# EAGLE board shield_horizontal+p (EAGLE 6.5.0)
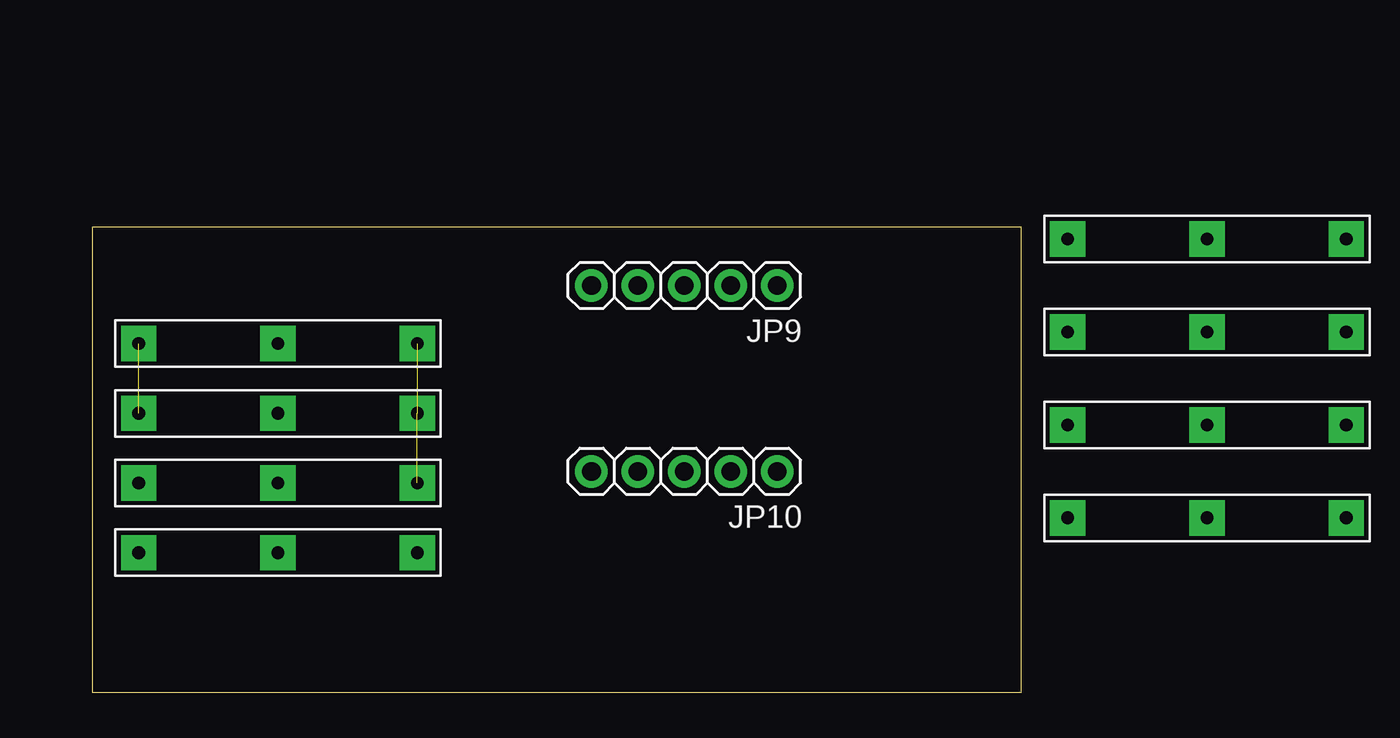
[diagram p0: board, top side]
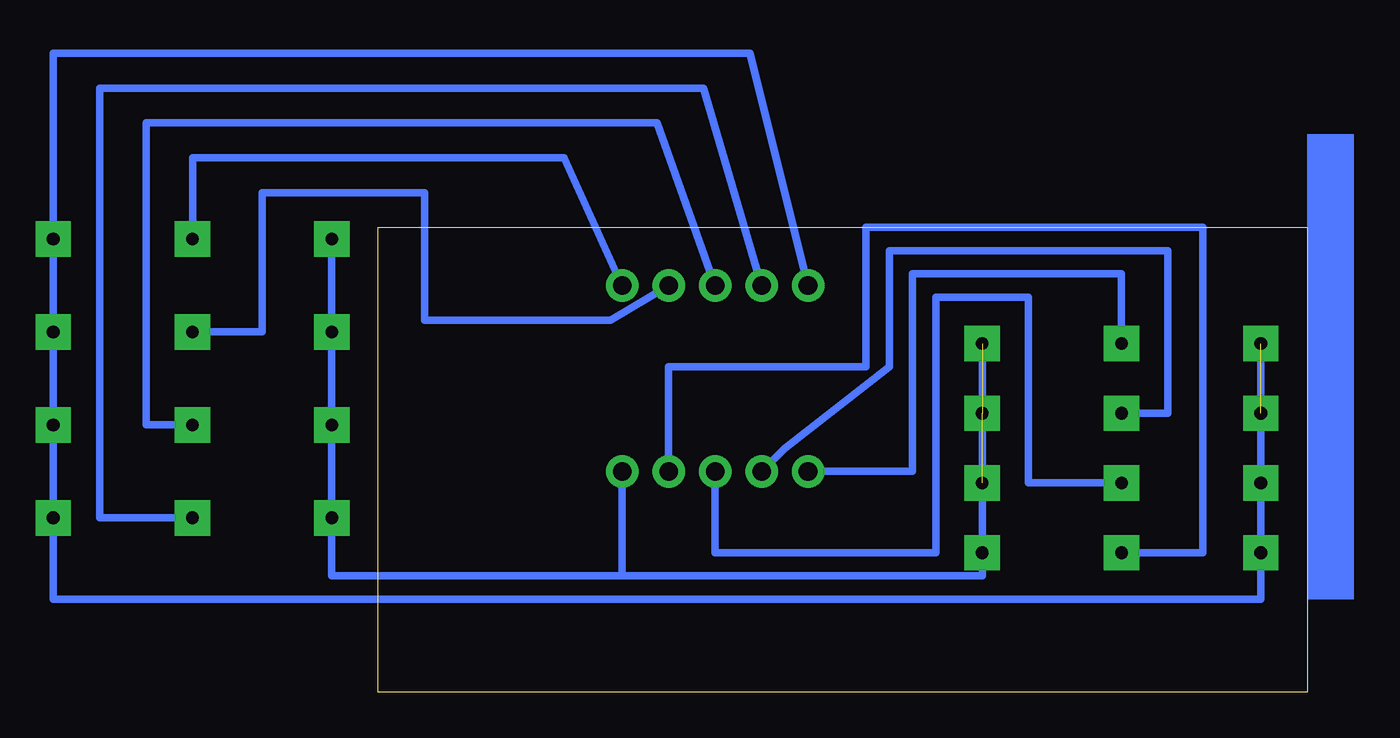
[diagram p1: board, bottom side, seen from below]

Size 50.8 x 25.4 mm. Coordinates in mm from the lower left corner, seen from the top.
Outline: 0,0 50.8,0 50.8,25.4 0,25.4 0,0
Copper layers (1*16): Top 0.035mm / dielectric 1.5mm / Bottom 0.035mm
Design rules "default": minimum track width 10mil, minimum drill 24mil, track to track 8mil, track to pad 8mil, pad to pad 8mil, via to via 8mil, smd to smd 8mil, copper to edge 40mil, drill to drill 8mil, minimum pad ring 10mil, minimum via ring 8mil, stop-mask expansion 4mil, vias tented up to drill 0mil, thermal gap 10mil

## Footprints (pad centres in the part's own frame; a part is rotated, then mirrored left to right if it is on the bottom)
1X03-POTENTIOSHIELD = drill 0.7 pad 1.93 square: 1 -7.62,0; 2 0,0; 3 7.62,0
1X05 = drill 1.016 pad 1.778: 1 -5.08,0; 2 -2.54,0; 3 0,0; 4 2.54,0; 5 5.08,0

## Placement (x,y rotation side)
JP1  [1X03-POTENTIOSHIELD]  60.96,24.77 0 top
JP2  [1X03-POTENTIOSHIELD]  60.96,19.68 0 top
JP3  [1X03-POTENTIOSHIELD]  60.96,14.61 0 top
JP4  [1X03-POTENTIOSHIELD]  60.96,9.53 0 top
JP5  [1X03-POTENTIOSHIELD]  10.16,7.62 180 top
JP6  [1X03-POTENTIOSHIELD]  10.16,11.43 180 top
JP7  [1X03-POTENTIOSHIELD]  10.16,15.24 180 top
JP8  [1X03-POTENTIOSHIELD]  10.16,19.05 180 top
JP9  [1X05]  32.38,22.23 180 top
JP10  [1X05]  32.38,12.06 180 top

## Library data of the parts
JP1-JP10 = manticore-lib

## Nets
GND: JP1.1 JP2.1 JP3.1 JP4.1 JP5.1 JP6.1 JP7.1 JP8.1 JP10.1
N$1: JP1.2 JP9.1
N$2: JP2.2 JP9.2
N$3: JP3.2 JP9.3
N$4: JP4.2 JP9.4
N$5: JP5.2 JP10.2
N$6: JP6.2 JP10.3
N$7: JP7.2 JP10.4
N$8: JP8.2 JP10.5
VCC: JP1.3 JP2.3 JP3.3 JP4.3 JP5.3 JP6.3 JP7.3 JP8.3 JP9.5

## Tracks (layer width: path | path; a pad name or v marks a point on that pad's centre or on a via)
GND  (2 unrouted)
  Bottom 0.406: JP1.1 JP2.1 JP3.1 JP4.1 53.34,6.35 37.47,6.35 | 37.47,6.35 17.78,6.35 JP5.1 JP8.1 | JP10.1 37.47,6.35
N$1
  Bottom 0.406: JP1.2 60.96,29.21 40.64,29.21 JP9.1
N$2
  Bottom 0.406: JP2.2 57.15,19.68 57.15,27.3 48.26,27.3 48.26,20.32 38.1,20.32 JP9.2
N$3
  Bottom 0.406: JP3.2 63.5,14.61 63.5,31.11 35.56,31.11 JP9.3
N$4
  Bottom 0.406: JP4.2 66.04,9.53 66.04,33.02 33.02,33.02 JP9.4
N$5
  Bottom 0.406: JP5.2 5.71,7.62 5.71,25.4 24.13,25.4 24.13,17.78 34.92,17.78 JP10.2
N$6
  Bottom 0.406: JP6.2 15.24,11.43 15.24,21.59 20.32,21.59 20.32,7.62 32.38,7.62 JP10.3
N$7
  Bottom 0.406: JP7.2 7.62,15.24 7.62,24.13 22.86,24.13 22.86,17.78 28.57,13.34 JP10.4
N$8
  Bottom 0.406: JP10.5 21.59,12.06 21.59,22.86 10.16,22.86 JP8.2
VCC  (1 unrouted)
  Bottom 0.406: JP3.3 JP2.3 JP1.3 68.58,34.92 30.48,34.92 JP9.5 | 68.58,13.97 JP3.3 | JP8.3 JP6.3 JP5.3 2.54,5.08 68.58,5.08 JP4.3 JP3.3
(copper drawn outside any net)
  shapes: Bottom area x1